# Allegro board P1-CEF-DRAGOTONIU.brd
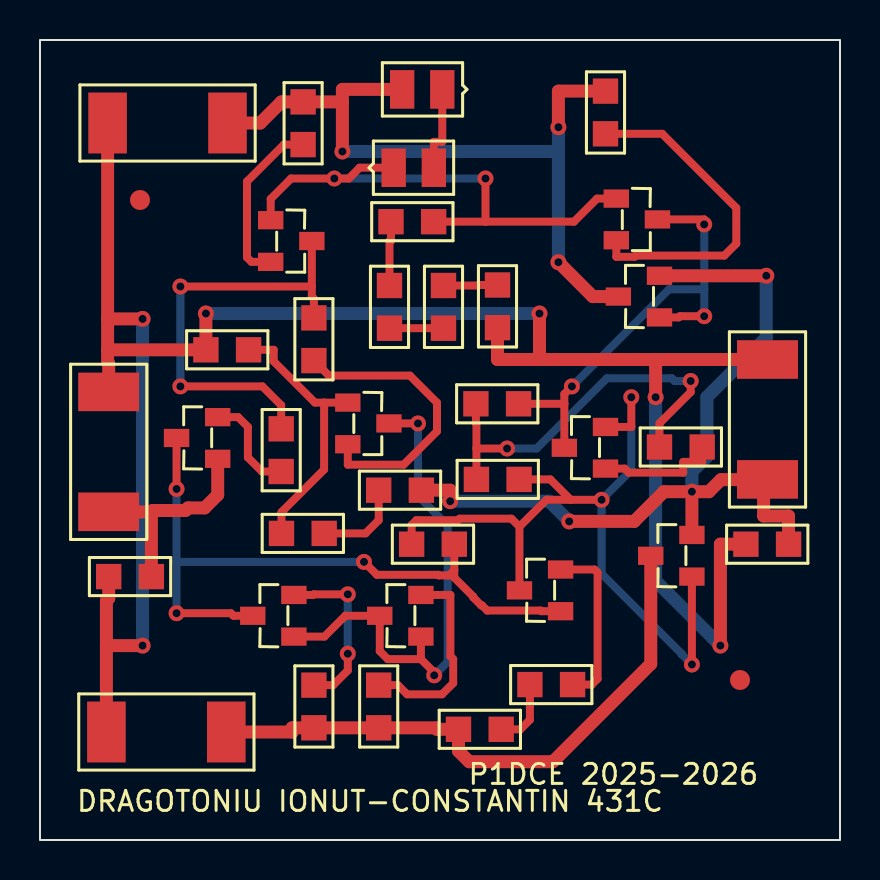
[diagram p0: board, top side]
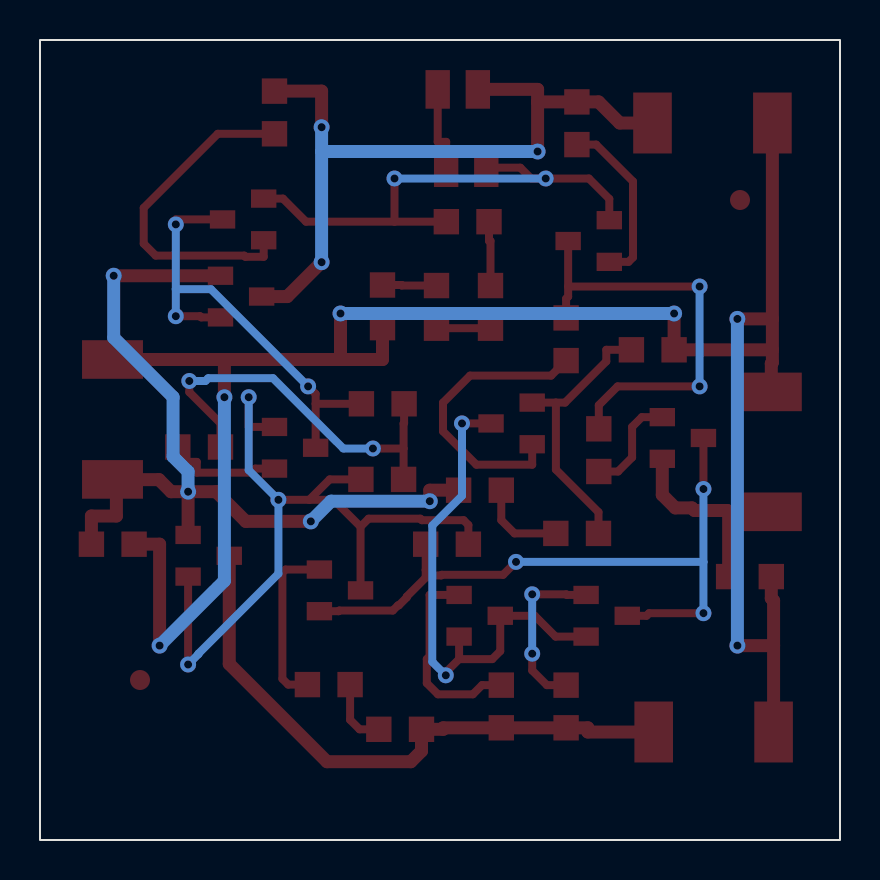
[diagram p1: board, bottom side, seen from below]

Outline 40 x 40 mm; copper layers: TOP, BOTTOM. Coordinates in mm from the lower left corner of the outline.
Outline path: rectangle 0,0 40,40

## Design rules (mm)
nets with their own width: min track width 0.4; nets N00310 N00393 N00563 N00697 N00755 N00813 N00956 N01096 N01200 N01615 N01664 N01726 N01808 N002520 N03379 N03391 N005260 N08317 N19945 N24266 N24278 N248370
nets with their own width: min track width 0.65; nets 0 VAC VCC VEE VOUT

## Placement (name value [footprint] x y rotation side)
C1  100p  [SMC0805]  20.71 14.79 180 top
D1  D1N4148  [SMD080512]  20.11 37.53 180 top
D2  D1N4148  [SMD080512]  17.68 33.62 0 top
J2  CON2  [SMR2512]  9.38 35.85 180 top
J3  CON2  [SMR2512]  3.44 16.41 90 top
J4  CON2  [SMR2512]  9.31 5.4 180 top
J5  CON2  [SMR2512]  36.38 18.03 90 top
NOREF  -  [unnamed]  5 32 0 top
NOREF#2  -  [unnamed]  35 8 0 top
Q1  BC856  [TO236AA]  11.54 30.99 180 top
Q2  BC856  [TO236AA]  28.82 32.07 180 top
Q3  BC856  [TO236AA]  32.59 13.17 0 top
Q5  BC856  [TO236AA]  8.88 19.06 0 top
Q6  BC846  [TO236AA]  19.05 10.17 0 top
Q7  BC846  [TO236AA]  12.7 10.17 0 top
Q8  BC846  [TO236AA]  26.03 11.44 0 top
Q10  BC846  [TO236AA]  28.27 18.57 0 top
Q13  BC846  [TO236AA]  30.98 26.13 0 top
Q14  BC856  [TO236AA]  15.39 21.87 180 top
R1  150k  [SMR0805]  3.44 13.17 0 top
R2  68  [SMR0805]  13.7 5.61 90 top
R3  68  [SMR0805]  16.93 5.61 90 top
R4  10  [SMR0805]  24.5 7.77 0 top
R5  10  [SMR0805]  20.93 5.54 0 top
R6  68  [SMR0805]  13.7 23.97 90 top
R7  68  [SMR0805]  12.06 18.43 90 top
R8  330  [SMR0805]  13.15 34.77 90 top
R9  68  [SMR0805]  28.27 35.31 90 top
R10  100  [SMR0805]  21.8 21.81 0 top
R11  100  [SMR0805]  23.95 18.03 180 top
R12  2k  [SMR0805]  12.07 15.33 0 top
R13  1k  [SMR0805]  16.93 17.49 0 top
R14  1k  [SMR0805]  8.29 24.51 0 top
R15  10  [SMR0805]  35.3 14.79 0 top
R17  1k  [SMR0805]  30.98 19.65 0 top
R18  33  [SMR0805]  17.55 30.91 0 top
R19  100  [SMR0805]  17.48 25.59 90 top
R23  100  [SMR0805]  20.18 25.59 90 top
R24  100  [SMR0805]  22.88 27.75 270 top

## Library data of the parts
C1 = C
D1 D2 = 1N4148_0
J2-J5 = CON2
Q1-Q3 Q5 Q14 = BC856_2
Q6-Q8 Q10 Q13 = BC846_0
R1-R15 R17-R19 R23 R24 = R

## Footprints (pads in the part's own frame, mm; a bottom-side part is the same pattern mirrored in y, then rotated)
SMC0805
  rect 1.27x1.27 smd: 1(0,0) 2(2.134,0)
SMD080512
  rect 1.219x1.93 smd: 1(0,0) 2(2.007,0)
SMR0805
  rect 1.27x1.27 smd: 1(0,0) 2(2.134,0)
SMR2512
  rect 1.93x3.048 smd: 1(0,0) 2(5.994,0)
TO236AA
  rect 1.27x0.914 smd: 1(0,0) 2(0,2.083) 3(-2.057,1.041)
unnamed
  round 1 smd: (0,0)

## Nets
VCC: D1.2 J2.1 Q13.3 R8.2 R9.2
VEE: J4.1 Q3.3 R2.1 R3.1 R5.1
0: J2.2 J3.2 J4.2 J5.2 R1.1 R14.1 R15.1 R24.2
VAC: J3.1 Q5.1 R1.2
VOUT: J5.1 Q3.2(E) Q13.2(E) R13.2 R15.2
N00310: Q6.1 Q6.3 Q7.1 Q14.3
N00393: C1.1 Q5.3 Q7.3 Q8.1
N00563: R4.1 R5.2
N00697: Q5.2(E) R7.1
N00755: Q14.2(E) R6.1
N00813: Q1.3 R6.2 R7.2
N00956: Q1.2(E) R8.1
N01096: Q2.2(E) R9.1
N01200: Q2.3 Q10.3 Q13.1 R10.2
N01615: R10.1 R11.2 R17.1
N01664: C1.2 Q3.1 Q8.3 Q10.2(E) R11.1
N01726: Q14.1 R12.1 R14.2
N01808: R12.2 R13.1
N002520: Q7.2(E) R2.2
N03379: D2.1 Q1.1 Q2.1 R18.2
N03391: D1.1 D2.2
N005260: Q8.2(E) R4.2
N08317: Q6.2(E) R3.2
N19945: Q10.1 R17.2
N24266: R18.1 R19.2
N24278: R19.1 R23.1
N248370: R23.2 R24.1

## Via types
v1: diameter 0.8, hole 0.4, TOP to BOTTOM, 32 vias

## Routing (per net, layer and track width the routed paths; a pad name or vN(x,y) marks a point on that pad's centre or on a via; arc(x,y) is an arc through that point)
VCC: length 37.7
  TOP w0.65: 15.12,36.9 R8.2 12.07,36.9 11.01,35.85 J2.1 ; 15.12,36.9 15.12,37.53 D1.2 ; 15.12,36.9 v1(15.12,34.42) ; v1(25.92,35.64) 25.92,37.44 R9.2 ; v1(25.92,28.89) 27.64,27.17 Q13.3
  BOTTOM w0.65: 25.92,34.42 v1(15.12,34.42) ; 25.92,34.42 v1(25.92,28.89) ; 25.92,34.42 v1(25.92,35.64)
VEE: length 30.2
  TOP w0.65: Q3.3 30.54,8.8 25.65,3.92 21.46,3.92 20.93,4.45 R5.1 19.84,5.54 19.84,5.61 R3.1 R2.1 12.61,5.61 12.61,5.4 J4.1
0: length 104
  TOP w0.65: 24.98,24.02 22.88,24.02 R24.2 ; 24.98,24.02 v1(24.98,26.32) ; 24.98,24.02 30.78,24.02 ; 3.38,26.05 J2.2 ; 3.38,26.05 3.38,24.51 ; 3.38,26.05 v1(5.13,26.05) ; 3.38,24.51 3.38,23.88 3.44,23.82 J3.2 ; 3.38,24.51 R14.1 v1(8.29,26.32) ; v1(30.78,22.14) 30.78,24.02 ; 30.78,24.02 31.46,24.02 J5.2 ; v1(34.02,9.72) 34.02,14.79 R15.1 ; v1(5.13,9.72) 3.32,9.72 ; 3.32,9.72 3.32,11.97 3.44,12.08 R1.1 ; 3.32,9.72 J4.2
  BOTTOM w0.65: v1(30.78,22.14) 30.78,12.96 v1(34.02,9.72) ; v1(5.13,9.72) v1(5.13,26.05) ; v1(8.29,26.32) v1(24.98,26.32)
VAC: length 10.8
  TOP w0.65: R1.2 5.57,16.41 ; 5.57,16.41 J3.1 ; 5.57,16.41 5.63,16.48 7.27,16.48 7.4,16.61 8.23,16.61 8.88,17.25 Q5.1
VOUT: length 43.5
  TOP w0.65: R13.2 20.51,17.49 v1(20.51,16.94) ; v1(26.46,15.93) 29.71,15.93 31.2,17.41 v1(32.59,17.41) ; Q13.2 v1(36.31,28.21) ; 36.23,17.88 36.18,17.84 36.18,16.2 37.43,16.2 R15.2 ; 36.23,17.88 36.09,18.02 34.05,18.02 33.45,17.41 v1(32.59,17.41) ; 36.23,17.88 J5.1 ; v1(32.59,17.41) Q3.2
  BOTTOM w0.65: v1(36.31,28.21) 36.31,25.11 33.34,22.14 33.34,19.17 32.59,18.42 v1(32.59,17.41) ; v1(20.51,16.94) 25.45,16.94 v1(26.46,15.93)
N00310: length 25.9
  TOP w0.4: v1(19.71,8.23) 19.71,8.38 19.05,9.04 ; 19.05,9.04 17.39,9.04 16.99,9.45 Q6.3 15.26,11.21 14.22,10.17 Q7.1 ; 19.05,9.04 Q6.1 ; Q14.3 v1(18.9,20.83)
  BOTTOM w0.4: v1(18.9,20.83) 18.9,17.21 20.39,15.72 20.39,8.91 v1(19.71,8.23)
N00393: length 34.6
  TOP w0.4: Q8.1 25.07,11.44 25.03,11.47 22.36,11.47 22.1,11.73 22.06,11.73 21.66,12.13 21.66,12.17 20.71,13.12 20.71,13.5 ; 20.71,13.5 C1.1 ; 20.71,13.5 20.45,13.23 19.94,13.23 19.91,13.26 16.84,13.26 v1(16.2,13.9) ; Q7.3 9.68,11.21 9.55,11.34 v1(6.83,11.34) ; Q5.3 v1(6.83,17.55)
  BOTTOM w0.4: 6.83,13.9 v1(6.83,11.34) ; 6.83,13.9 v1(16.2,13.9) ; 6.83,13.9 v1(6.83,17.55)
N00563: length 3.4
  TOP w0.4: R5.2 24.02,5.54 24.5,6.01 R4.1
N00697: length 5.2
  TOP w0.4: Q5.2 9.91,21.14 10.39,20.66 10.39,19.13 11.1,18.43 R7.1
N00755: length 14.6
  TOP w0.4: R6.1 14.45,23.22 18.5,23.22 19.85,21.86 19.85,20.43 18.18,18.77 15.39,18.77 Q14.2
N00813: length 22.1
  TOP w0.4: R6.2 13.7,27.07 13.59,27.17 13.59,27.68 ; 13.59,27.68 Q1.3 ; 13.59,27.68 v1(7.02,27.68) ; R7.2 12.06,21.74 11.12,22.68 v1(7.02,22.68)
  BOTTOM w0.4: v1(7.02,22.68) v1(7.02,27.68)
N00956: length 8.6
  TOP w0.4: Q1.2 10.57,28.91 10.35,29.13 10.35,32.93 12.19,34.77 R8.1
N01096: length 17
  TOP w0.4: R9.1 31.11,35.31 34.81,31.61 34.81,29.82 34.22,29.22 29.79,29.22 29.73,29.16 28.82,29.16 Q2.2
N01200: length 23.6
  TOP w0.4: Q2.3 33.21,31.03 v1(33.21,30.78) ; 26.22,21.81 Q10.3 ; 26.22,21.81 26.22,22.3 v1(26.59,22.68) ; 26.22,21.81 R10.2 ; Q13.1 31.94,26.13 32,26.19 v1(33.21,26.19)
  BOTTOM w0.4: v1(26.59,22.68) 31.45,27.54 33.21,27.54 ; 33.21,27.54 v1(33.21,26.19) ; 33.21,27.54 v1(33.21,30.78)
N01615: length 20
  TOP w0.4: R10.1 21.8,20.85 21.82,20.82 21.82,19.57 ; v1(32.53,22.95) 32.53,22.39 30.98,20.84 R17.1 ; 21.82,19.57 R11.2 ; 21.82,19.57 v1(23.36,19.57)
  BOTTOM w0.4: v1(32.53,22.95) 31.73,22.95 31.59,23.09 28.35,23.09 24.83,19.57 v1(23.36,19.57)
N01664: length 40.5
  TOP w0.4: 26.54,17.01 25.32,17.01 23.97,15.66 ; 26.54,17.01 v1(28.08,17.01) ; 26.54,17.01 25.52,18.03 R11.1 ; C1.2 18.58,15.75 18.82,15.99 20.91,15.99 20.98,16.07 23.57,16.07 23.97,15.66 ; Q10.2 29.57,20.65 v1(29.57,22.14) ; Q8.3 23.97,15.66 ; v1(32.59,8.78) Q3.1
  BOTTOM w0.4: v1(32.59,8.78) 32.08,9.29 32.08,9.31 28.08,13.31 v1(28.08,17.01) 29.57,18.5 v1(29.57,22.14)
N01726: length 13.8
  TOP w0.4: R12.1 12.07,16.39 14.21,18.52 14.21,21.87 ; R14.2 11.69,24.51 11.69,23.93 13.75,21.87 14.21,21.87 ; 14.21,21.87 Q14.1
N01808: length 4.5
  TOP w0.4: R13.1 16.93,15.99 16.27,15.33 R12.2
N002520: length 8.5
  TOP w0.4: R2.2 14.66,7.74 15.39,8.48 v1(15.39,9.31) ; v1(15.39,12.29) 13.69,12.29 13.66,12.25 Q7.2
  BOTTOM w0.4: v1(15.39,9.31) v1(15.39,12.29)
N03379: length 27.2
  TOP w0.4: R18.2 22.27,30.91 ; 22.27,30.91 26.7,30.91 27.85,32.07 Q2.1 ; 22.27,30.91 v1(22.27,33.08) ; D2.1 15.98,33.62 15.44,33.08 v1(14.71,33.08) 12.55,33.08 11.54,32.06 Q1.1
  BOTTOM w0.4: v1(22.27,33.08) v1(14.71,33.08)
N03391: length 4.3
  TOP w0.4: D1.1 20.11,34.91 19.69,34.91 D2.2
N005260: length 8.6
  TOP w0.4: Q8.2 27.73,13.52 27.88,13.37 27.88,8.06 27.59,7.77 R4.2
N08317: length 10.1
  TOP w0.4: Q6.2 20.52,12.25 20.52,9.19 20.66,9.04 20.66,7.84 20.1,7.29 18.36,7.29 17.9,7.74 R3.2
N19945: length 6.2
  TOP w0.4: Q10.1 29.24,18.57 29.44,18.36 32.16,18.36 32.16,18.91 33.11,18.91 R17.2
N24266: length 3.3
  TOP w0.4: R18.1 17.55,29.95 17.48,29.95 R19.2
N24278: length 2.7
  TOP w0.4: R19.1 R23.1
N248370: length 2.7
  TOP w0.4: R23.2 21.91,27.72 21.91,27.75 R24.1

## Text on the board
Ref Des/Silkscreen Top: DRAGOTONIU IONUT-CONSTANTIN 431C | P1DCE 2025-2026
XSECTION_CHART: *  SURFACE - AIR 0 MM | L1 TOP CONDUCTOR - COPPER 0.018 MM | *  DIELECTRIC - FR-4 1.564 MM | L2 BOTTOM CONDUCTOR - COPPER 0.018 MM | DESIGN CROSS SECTION CHART | ___________________________ | TOTAL THICKNESS 1.6 MM
NCLEGEND-1-2: FIGURE | FINISHED_SIZE | 0.4 | DRILL CHART: TOP to BOTTOM | ALL UNITS ARE IN MILLIMETERS | PLATED | QTY | 32
